# Altium PCB nRF52_UWB_MPU_MPU_V2.0.pcbdoc
Units mil, origin at the board's own origin, x right, y up, seen from the top; angles counter-clockwise.
Board outline 3067.68 x 2456.36 mil, 2 copper layers (Top Layer, Bottom Layer); 31 components, 31 nets, 182 pads, 77 vias.
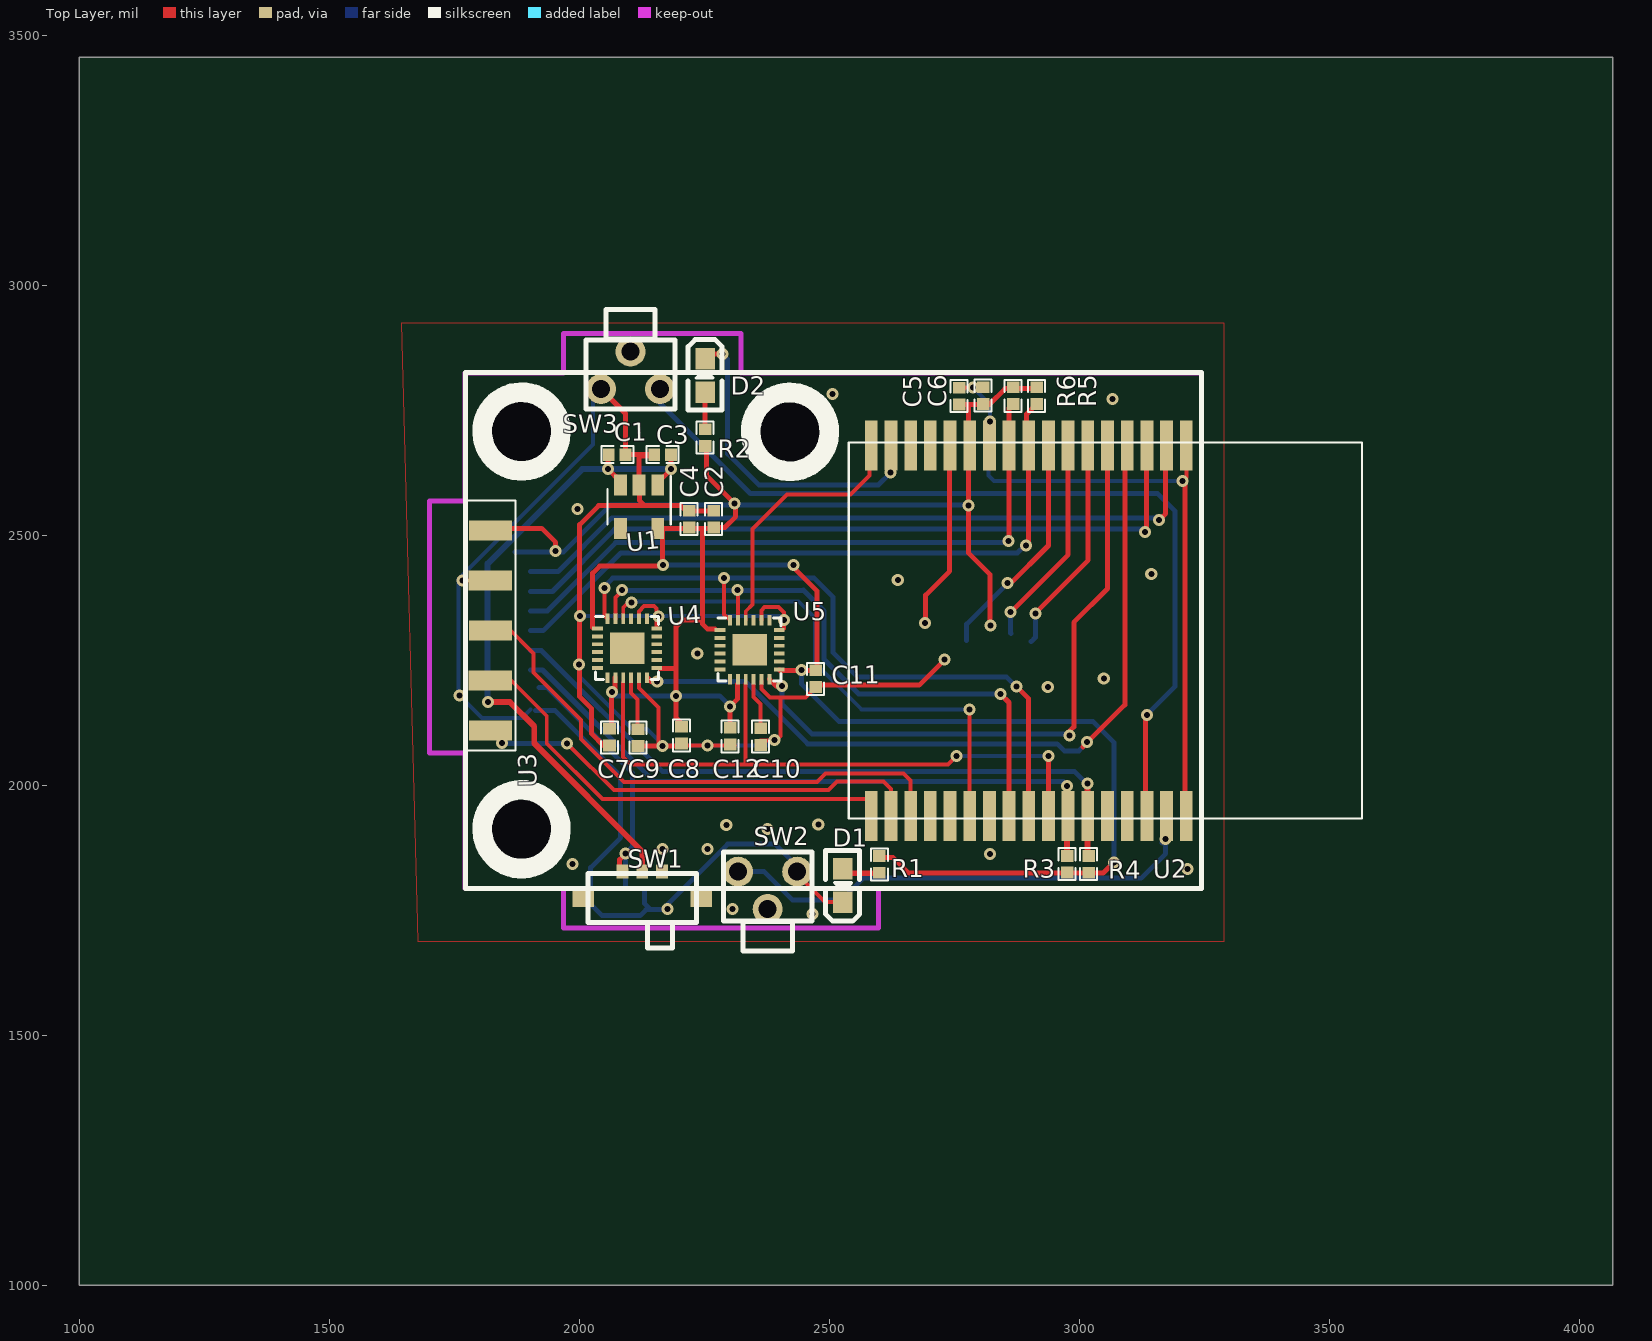
[diagram p0: Top Layer view]
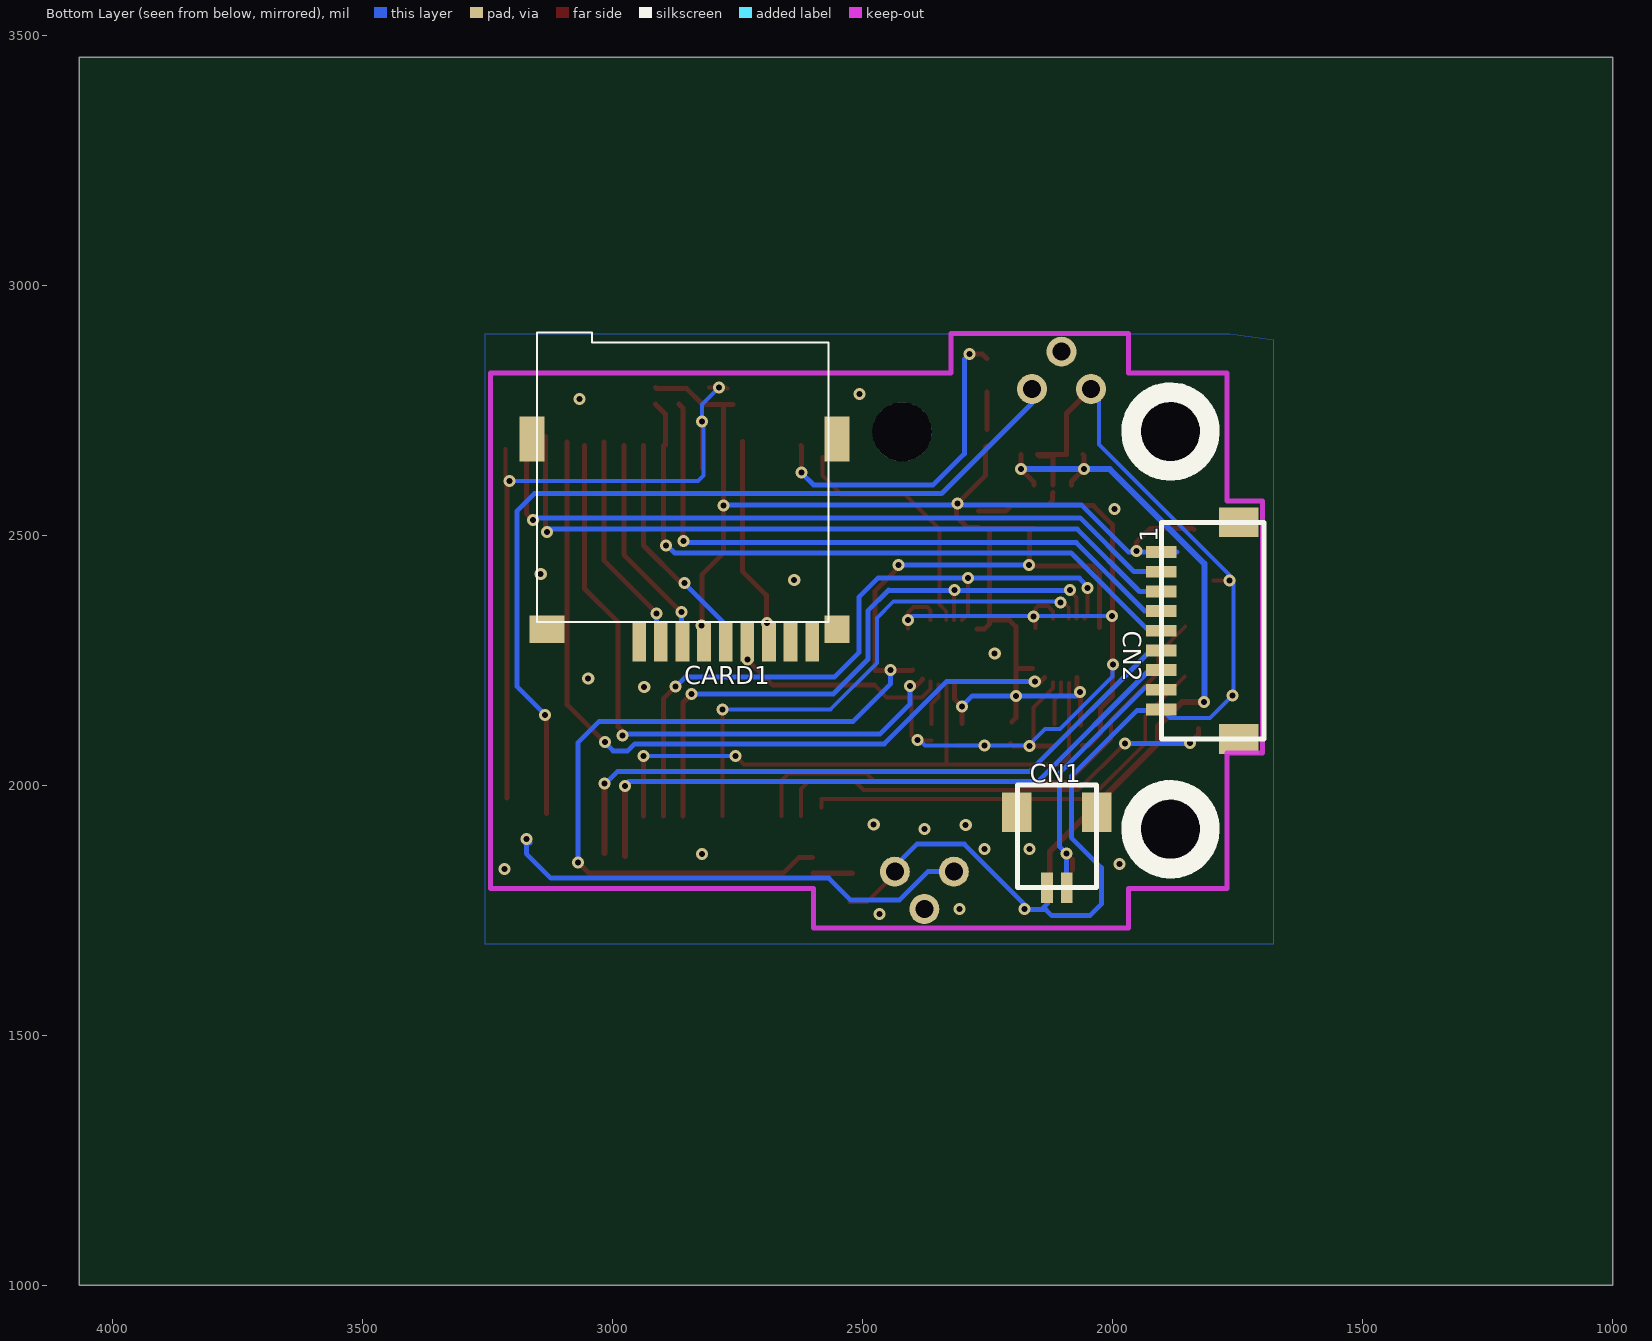
[diagram p1: Bottom Layer view, seen from below]

## Layer stack, top to bottom
Top Layer: signal copper (thickness not stored)
Dielectric: dielectric 12.6, FR-4, Dk 4.8
Bottom Layer: signal copper (thickness not stored)

## Board outline
4067.68,1000 1000,1000 1000,3456.36 4067.68,3456.36

## Components (designator, comment, footprint, x,y, rotation, side; value= is the part's Value field where it differs from the comment)
C1 "10uF" 0402#1 2076.18,2661.11 r180 top
C2 "10uF" 0402#1 2269.18,2532.11 r270 top
C3 "100nF" 0402#1 2167.18,2661.11 r0 top
C4 "100nF" 0402#1 2220.18,2532.11 r270 top
C5 "10uF" 0402#1 2760.18,2778.11 r270 top
C6 "100nF" 0402#1 2808.18,2779.11 r270 top
C7 "10nF" 0402#1 2061.18,2096.11 r90 top
C8 "100nF" 0402#1 2205.18,2100.11 r90 top
C9 "100nF" 0402#1 2118.18,2095.11 r270 top
C10 "100nF" 0402#1 2363.18,2097.11 r270 top
C11 "100nF" 0402#1 2473.18,2213.11 r90 top
C12 "10nF" 0402#1 2302.18,2098.11 r90 top
CARD1 "HYC77-TF09-200" TF-015 2857.18,2489.75 r180 bottom
CN1 "A1002WV-S-2P" A1002WR-S-2P_LEO 2112.11,1871.23 r180 bottom
CN2 "A1002WR-S-9P" A1002WR-S-9P_LEO 1827.27,2309.04 r270 bottom
D1 "RED" LED-0603 2527.18,1799.71 r90 top
D2 "GREEN" LED-0603 2252.18,2819.71 r270 top
R1 "1K" 0402#1 2600.37,1841.7 r270 top
R2 "200" 0402#1 2252.18,2695.11 r270 top
R3 "10K" 0402#1 2976.18,1842.11 r270 top
R4 "10K" 0402#2 3019.14,1841.87 r270 top
R5 "10K" 0402#1 2915.18,2779.11 r90 top
R6 "10K" 0402#1 2868.18,2779.11 r90 top
SW1 "SSAJ120100" SW-SMD-5.5X2.5 2126.51,1801.13 r0 top
SW2 "KAN4562-0501C" KAN4562-0501C 2377.17,1789.7 r0 top
SW3 "KAN4562-0501C" KAN4562-0501C 2102.87,2829.7 r180 top
U1 "SPX3819M5-L-3-3/TR" SOT-23-5 2120.18,2557.11 r270 top
U2 "DWM1001" DWM1001 3051.78,2309.01 r270 top
U3 "GPS_Header" GPS_HEADER_SMT_NEW 1772.71,1793.84 r90 top
U4 "MPU-9250" QFN-24-1EP_3X3MM_PITCH0.4MM 2096.18,2274.11 r0 top
U5 "MPU-9250" QFN-24-1EP_3X3MM_PITCH0.4MM 2341.18,2271.11 r0 top

## Footprints (in the part's own frame and the unit in brackets; to place one, negate y for a bottom-side part, rotate by r counter-clockwise, add the part's x,y. Pads: shape width x height; smd on the part's side, far side on the other; paste and mask are expansions set on the pad)
0402#1 [mil]
  rect 23.6x25.6 smd: 1(-16.69,0.01) 2(16.7,0)
  silkscreen extent -32,-17 32,17
0402#2 [mil]
  rect 23.7x25.6 smd: 1(-16.68,0.03) 2(16.72,0.03)
  silkscreen extent -32,-17 32,17
A1002WR-S-2P_LEO [mil]
  rect 23.6x61 smd: 1(-19.77,-75.78) 2(19.63,-75.78)
  rect 59.1x78.8 smd: 3(-80.02,74.97) 4(79.98,74.97)
  silkscreen extent -79,-76 79,129
A1002WR-S-9P_LEO [mil]
  rect 23.6x61 smd: 1(-157.46,-75.7) 2(-118.06,-75.7) 3(-78.56,-75.8) 4(-39.36,-75.7) 5(0.04,-75.7) 6(39.44,-75.7) 7(78.74,-75.7) 8(118.14,-75.7) 9(157.54,-75.7)
  rect 59.1x78.7 smd: 10(-216.51,78.75)
  rect 59x78.7 smd: 11(216.54,78.75)
  silkscreen extent -217,-76 217,129
DWM1001 [mm]
  rect 2.54x0.65 smd: 1(-9.405,4.13) 2(-9.405,3.129) 3(-9.405,2.128) 4(-9.405,1.129) 5(-9.405,0.129) 6(-9.405,-0.871) 7(-9.405,-1.872) 8(-9.405,-2.87) 9(-9.405,-3.871) 10(-9.405,-4.872) 11(-9.405,-5.87) 12(-9.405,-6.871) 13(-9.405,-7.872) 14(-9.405,-8.871) 15(-9.405,-9.871) 16(-9.405,-10.871) 17(-9.405,-11.872) 18(9.406,-11.872) 19(9.406,-10.871) 20(9.406,-9.871) 21(9.406,-8.871) 22(9.406,-7.872) 23(9.406,-6.871) 24(9.406,-5.87) 25(9.406,-4.872) 26(9.406,-3.871) 27(9.406,-2.87) 28(9.406,-1.872) 29(9.406,-0.871) 30(9.406,0.129) 31(9.406,1.129) 32(9.406,2.128) 33(9.406,3.129) 34(9.406,4.13)
  silkscreen extent -9.56,-13.02 9.54,13.05
GPS_HEADER_SMT_NEW [mm]
  rect 1.021x2.2 smd: 1(18.18,-1.27) 3(13.1,-1.27) 5(8.02,-1.27)
  rect 1.021x2.202 smd: 2(15.64,-1.27) 4(10.56,-1.27)
  round 3 hole 3 slot 3.002 at 90 deg unplated: ""(3,-2.85) ""(23.2,-2.85)
  silkscreen extent 0,-37.4 26.2,0
KAN4562-0501C [mil]
  round 60 hole 36: 0(0,-37.4) 1(-59.05,37.4) 2(59.06,37.4)
  silkscreen extent -89,-122 89,77
LED-0603 [mil]
  rect 43x39 smd: 1(33.5,0) 2(-33.5,0)
  silkscreen extent -72,-34 70,34
QFN-24-1EP_3X3MM_PITCH0.4MM [mil]
  rect 21.65x7.87 smd: 1(-59.06,39.34) 2(-59.06,23.64) 3(-59.06,7.84) 4(-59.06,-7.86) 5(-59.06,-23.66) 6(-59.06,-39.36) 13(59.04,-39.36) 14(59.04,-23.66) 15(59.04,-7.86) 16(59.04,7.84) 17(59.04,23.64) 18(59.04,39.34)
  rect 7.87x21.65 smd: 7(-39.36,-59.06) 8(-23.66,-59.06) 9(-7.86,-59.06) 10(7.84,-59.06) 11(23.64,-59.06) 12(39.34,-59.06) 19(39.34,59.04) 20(23.64,59.04) 21(7.84,59.04) 22(-7.86,59.04) 23(-23.66,59.04) 24(-39.36,59.04)
  rect 34.45x31.5 smd: 25(-17.11,-15.76) 25(-17.11,15.74) 25(17.14,-15.76) 25(17.14,15.74)
  silkscreen extent -63,-63 63,63
SOT-23-5 [mm]
  rect 1.06x0.65 smd: 1(-1.1,0.95) 2(-1.1,0) 3(-1.1,-0.95) 4(1.1,-0.95) 5(1.1,0.95)
  silkscreen extent -1.55,-1.61 0.9,1.61
SW-SMD-5.5X2.5 [mm]
  rect 0.599x0.701 smd: 1(-0.999,0.675) 2(1,0.675) C(-0.001,0.675)
  rect 1.1x0.9 smd: 4(-2.999,-0.675) 5(3,-0.675)
  silkscreen extent -2.75,-3.22 2.75,0.58
TF-015 [mil]
  rect 27.6x78.8 smd: 1(-90.2,-202.55) 4(39.5,-202.55) 5(82.8,-202.55) 6(126,-202.55) 7(169.2,-202.55) 8(212.4,-202.55) 9(255.9,-202.55)
  rect 27.5x78.7 smd: 2(-46.94,-202.5)
  rect 27.5x78.8 smd: 3(-3.75,-202.55)
  rect 50x55 smd: 10(305,-177.4)
  rect 50x90 smd: 11(305.01,202.55) 12(-304.99,202.55)
  rect 70x55 smd: 13(-274.99,-177.45)
  silkscreen extent -295,-163 288,416

## Free pads (board coordinates)
  round 118.11 hole 118.1 slot 118.3 at 0 deg unplated: ""(2421.79,2706.64)

## Via types
v1: diameter 24.02, hole 12, Top Layer to Bottom Layer, 70 vias
v2: diameter 24.41, hole 12, Top Layer to Bottom Layer, 7 vias

## Nets (pads, with @x,y where several pads share a name; then routed paths per layer and width w, separated by ;. In a path a pad name is that pad's centre, name@x,y a point inside that pad or via, vN(x,y) a via of type N, cw(c..) or ccw(c..) an arc to the next point about the centre after c; other vN are vias at no path point)
BUTTON_RST: SW2.1 U2.33 | length 953.7
  Bottom Layer w10: SW2.1@2318.13,1827.15 2370.14,1827.15 2427.18,1770.11 2524.18,1770.11 2568.18,1814.11 3124.18,1814.11 3173.18,1863.11 v1@3173.18,1891.11
  Bottom Layer w11.81: v1@3167.18,1885.11 v1@3173.18,1891.11
  other v1: 3172.83,1892.11
BUTTON_SDCARD: SW3.1 U2.32 | length 1779.5
  Top Layer w10: U2.32@3133.18,1943.11 v1@3133.18,2146.11
  Bottom Layer w10: SW3.1@2161.94,2792.35 2161.94,2764.13 2342.96,2583.11 3157.18,2583.11 3191.37,2548.92 3191.37,2197.3 v1@3136.18,2142.11
  other v1: 3135.83,2140.11
CHARGE_VC: CN1.2 CN2.8 SW1.1 | length 530.6
  Top Layer w10: SW1.1@2081.18,1830.11 2081.18,1851.11 v1@2093.18,1863.11
  Bottom Layer w10: CN2.8@1920.18,2195.11 1936.18,2195.11 2107.18,2024.11 2107.18,1877.81 2092.48,1863.11 CN1.2
  other v1: 2092.83,1863.11
D2_1: D2.1 R2.1 | length 74.4
  Top Layer w10: R2.1 D2.1
FOOT_2: CN2.4 R6.1 U2.10 | length 1293.5
  Top Layer w10: v1@2859.93,2485.11 2859.93,2754.16 R6.1
  Bottom Layer w10: CN2.4 1936.52,2348.45 2073.18,2485.11 v1@2859.18,2485.11
  other v1: 2859.18,2488.11
FOOT_5: CN2.5 R5.1 U2.9 | length 1349.4
  Top Layer w10: U2.9@2895.18,2680.11 2895.18,2742.41 R5.1 ; v1@2899.28,2479.11 U2.9@2899.28,2679.25
  Bottom Layer w10: CN2.5 1928.12,2309.05 2083.77,2464.7 2876.77,2464.7 v1@2891.18,2479.11
  other v1: 2894.18,2479.11
FOOT_6: CN2.6 R4.1 U2.29 | length 1365.8
  Top Layer w11.81: v1@3016.18,2004.11 3017.18,2003.11 R4.1@3017.18,1864.11
  Bottom Layer w10: CN2.6 1924.64,2269.65 2166.59,2027.7 2990.59,2027.7 v1@3017.18,2001.11
  other v1: 3016.83,2003.11
FOOT_7: CN2.7 R3.1 U2.28 | length 1310.7
  Top Layer w11.81: R3.1 v1@2976.18,1998.11
  Bottom Layer w10: CN2.7@1902.98,2230.35 1926.94,2230.35 2149.59,2007.7 2968.59,2007.7 v1@2978.18,1998.11
  other v1: 2975.83,1998.11
GND: C1.1 C2.1 C3.1 C4.1 C5.1 C6.1 C7.1 C8.1 C9.2 C10.2 C11.1 C12.1 CARD1.6 CN1.1 CN2.9 D1.2 SW2.2 SW3.2 U1.2 U2.1 U2.11 U2.24 U2.34 U3.2 U4.11 U4.18 U4.20 U5.11 U5.18 U5.20 | length 6577.8
  Top Layer w7.87: v1@1761.18,2179.11 v1@1762.18,2180.11 ; v1(1767.37,2409.7) U3.2@1799.37,2409.7 ; U4.20 2119.83,2347.76 2130.18,2358.11 2150.18,2358.11 2155.18,2353.11 U4.18@2155.18,2314.11 ; U4.11@2120.18,2205.11 2120.18,2194.11 2159.18,2155.11 v1@2159.18,2078.41 ; C8.1@2209.18,2079.11 C12.1@2312.18,2079.11 ; C10.2@2363.18,2089.41 2394.48,2089.41 2403.18,2098.11 2403.18,2175.7 ; U5.20 2364.83,2349.76 2371.18,2356.11 2399.18,2356.11 2410.18,2345.11 U5.18@2410.18,2313.11 ; U5.11@2365.08,2207.39 2365.08,2192.21 2381.59,2175.7 2452.77,2175.7 C11.1@2477.18,2200.11 ; SW2.2@2441.18,1817.11 2492.04,1766.25 D1.2 ; C5.1@2771.18,2793.11 2773.88,2795.81 C6.1 ; U2.11@2820.18,2729.11 2822.18,2727.11 U2.11@2822.18,2633.11 ; v1@3207.18,2607.11 3215.18,2615.11 U2.1@3215.18,2672.11
  Top Layer w10: SW3.2@2043.83,2792.35 2092.88,2743.3 C1.1 C3.1 2147.48,2658.11 2119.18,2658.11 2120.18,2657.11 U1.2 ; C7.1 2048.88,2079.41 2025.18,2103.11 2025.18,2153.11 2001.18,2177.11 2001.18,2521.11 2039.18,2559.11 2203.18,2559.11 2213.48,2548.81 C2.1 ; C9.2 2200.18,2078.41 C8.1 ; U1.2@2120.18,2585.11 2121.18,2584.11 2121.18,2569.11 2131.18,2559.11 ; C11.1@2477.18,2200.11 2680.18,2200.11 v1@2731.18,2251.11 ; v1(3206.83,2608.11) 3212.18,2602.76 U2.34@3212.18,1974.11
  Bottom Layer w7.87: CN2.9@1902.98,2151.55 1885.54,2134.11 1806.18,2134.11 1759.18,2181.11 1759.18,2412.11 2028.18,2681.11 2028.18,2776.7 SW3.2@2043.83,2792.35 ; v1@2000.18,2241.11 2000.95,2240.34 2000.95,2217.11 2105.95,2112.11 2136.18,2112.11 2169.18,2079.11 2376.18,2079.11 v1@2388.18,2091.11 ; v1@2002.18,2338.11 2401.83,2338.11 v1(2409.83,2330.11) ; v1(2787.83,2795.81) 2821.83,2761.81 v1(2821.83,2727.11) 2819.18,2724.46 2819.18,2619.11 2830.18,2608.11 v1(3206.83,2608.11)
  Bottom Layer w10: CN2.9@1913.18,2149.11 1952.18,2149.11 2083.18,2018.11 2083.18,1895.11 2023.18,1835.11 2023.18,1762.11 2046.18,1739.11 2122.18,1739.11 2134.18,1751.11 2166.18,1751.11 2297.18,1882.11 2392.18,1882.11 SW2.2@2437.18,1837.11 ; CN1.1@2131.18,1792.11 2131.18,1763.11 2143.18,1751.11 ; SW2.2@2428.18,1808.11 SW2.2@2435.18,1815.11
  other v1: 2467.18,1742.11 2177.18,1752.11 2307.18,1752.11 3217.18,1832.11 1987.18,1842.11 2821.37,1862.7 2167.18,1872.11 2257.18,1872.11 2377.18,1912.11 2167.18,2078.41 2257.18,2079.11 2391.27,2090.2 1760.83,2179.11 1999.83,2241.11 2730.83,2251.11 2001.83,2338.11 2158.91,2337.93 1997.18,2552.11 3067.18,2772.11 2507.18,2782.11
  other v2: 2294.37,1920.7 2478.37,1921.7 2937.37,2196.7 3049.36,2213.68 2236.37,2263.7 2637.37,2410.7 3144.37,2422.7
GPS_1PPS: U2.19 U3.5 | length 916.1
  Top Layer w7.87: v1@1981.18,2078.89 2069.96,1990.11 2499.18,1990.11 2516.18,2007.11 2609.18,2007.11 2623.68,1992.61 U2.19@2623.68,1938.75
  Top Layer w10: U3.5@1829.37,2113.7 1829.37,2101.7 v1(1846.37,2084.7)
  Bottom Layer w10: v1@1843.37,2085.7 1845.37,2083.7 v1(1976.37,2083.7)
GPS_UART_RX: U2.18 U3.4 | length 877.8
  Top Layer w7.87: U3.4@1856.37,2217.7 1935.37,2138.7 1935.37,2083.7 2046.96,1972.11 2583.18,1972.11 U2.18@2583.18,1955.11
GPS_UART_TX: U2.20 U3.3 | length 1065
  Top Layer w7.87: U3.3@1855.37,2317.7 1909.18,2263.89 1909.18,2225.11 2004.18,2130.11 2004.18,2092.11 2090.18,2006.11 2476.18,2006.11 2493.18,2023.11 2649.18,2023.11 2663.08,2009.21 U2.20@2663.08,1938.75
INT_IMUA: U2.4 U4.12 | length 1593
  Top Layer w10: U4.12@2136.81,2215.06 2144.17,2207.7 v1(2156.37,2207.7) ; 3007.37,2076.7 3091.37,2160.7 U2.4@3091.37,2686.7
  Bottom Layer w10: v1(2156.37,2207.7) 2332.37,2207.7 2457.17,2082.9 2956.17,2082.9 2970.37,2068.7 2999.37,2068.7 v1@3017.09,2086.42
  other v1: 3015.37,2086.7
INT_IMUB: U2.5 U5.12 | length 1262.1
  Top Layer w10: U5.12@2380.53,2212.06 2393.89,2198.7 v1@2396.37,2198.7 ; v1@2976.37,2103.7 2989.37,2116.7 2989.37,2325.7 3056.85,2393.18 U2.5@3056.85,2679.26
  Bottom Layer w10: v1(2405.37,2198.7) 2405.37,2162.7 2465.37,2102.7 v1@2976.37,2102.7
  other v1: 2980.37,2099.7
LED_R: D2.2 U2.16 | length 658.3
  Top Layer w10: D2.2 2261.04,2862.11 v1(2287.18,2862.11) ; v1(2623.18,2625.11) 2623.18,2678.75 U2.16@2623.68,2679.25
  Bottom Layer w10: v1(2287.18,2862.11) 2297.18,2852.11 2297.18,2662.89 2359.37,2600.7 2598.77,2600.7 v1(2623.18,2625.11)
MPU92_CLK: U2.25 U4.23 U5.23 | length 1269.6
  Top Layer w7.87: U4.23 2072.53,2375.46 v1@2086.18,2389.11 ; U5.23 v1@2317.53,2390.11
  Top Layer w10: v1(2843.18,2182.11) 2859.93,2165.36 U2.25@2859.93,1938.75
  Bottom Layer w10: v1@2086.18,2389.11 2446.93,2389.11 ; 2448.93,2390.11 2490.18,2348.86 2490.18,2251.65 2558.95,2182.88 ; 2558.95,2182.11 v1(2843.18,2182.11)
  other v1: 2086.18,2390.11 2317.18,2390.11
MPU92_MISO: U2.27 U4.9 U5.9 | length 1293.1
  Top Layer w7.87: 2088.18,2204.11 2088.18,2056.11 2103.18,2041.11 2738.18,2041.11 v1(2755.18,2058.11) ; 2333.18,2041.11 U5.9@2333.18,2203.11
  Top Layer w10: U2.27@2938.68,1938.75 v1(2938.68,2058.11)
  Bottom Layer w7.87: v1(2755.18,2058.11) v1(2938.68,2058.11)
MPU92_MOSI: U2.26 U4.24 U5.24 | length 1416.8
  Top Layer w7.87: v1(2051.18,2394.11) 2051.18,2338.81 U4.24 ; v1@2290.18,2422.11 2290.18,2341.76 U5.24
  Top Layer w10: v1(2875.18,2197.11) 2899.28,2173.01 U2.26@2899.28,1938.75
  Bottom Layer w10: v1@2049.18,2396.11 2067.18,2414.11 2470.18,2414.11 2508.18,2376.11 2508.18,2265.11 2557.18,2216.11 2855.18,2216.11 2874.18,2197.11 v1(2875.18,2197.11)
  other v1: 2290.18,2414.11
MPU92_NCS: U2.23 U4.22 | length 1076.8
  Top Layer w7.87: U4.22 2088.33,2355.8 2099.64,2367.11 v1@2107.18,2367.11 ; U2.23@2781.18,1938.75 v1(2781.18,2151.11)
  Bottom Layer w7.87: v1@2105.18,2367.11 2439.4,2367.11 2472.18,2334.33 2472.18,2244.2 2565.27,2151.11 v1(2781.18,2151.11)
  other v1: 2105.18,2365.11
MPU92B_NCS: U2.17 U5.22 | length 503
  Top Layer w7.87: U5.22 2333.33,2348.04 2347.18,2361.89 2347.18,2512.11 2416.18,2581.11 2543.18,2581.11 2581.18,2619.11 U2.17@2581.18,2656.11
R1_2: D1.1 R1.2 | length 77
  Top Layer w11.81: D1.1@2522.18,1824.11 R1.2@2599.18,1824.11
SDCARD_CLK: CARD1.5 U2.8 | length 459.6
  Top Layer w10: v1@2860.18,2401.11 2938.68,2479.61 U2.8@2938.68,2679.25
  Bottom Layer w10: CARD1.5@2775.18,2289.11 2775.18,2322.11 v1@2857.18,2404.11
  other v1: 2856.83,2404.11
SDCARD_MISO: CARD1.7 U2.13 | length 383.1
  Top Layer w10: v1@2690.18,2325.11 2693.18,2328.11 2693.18,2380.11 2741.18,2428.11 U2.13@2741.18,2687.11
  other v1: 2691.83,2324.11
SDCARD_MOSI: CARD1.3 U2.7 | length 424.3
  Top Layer w10: v1@2863.18,2346.11 2978.08,2461.01 U2.7@2978.08,2679.25
  Bottom Layer w10: v1(2862.83,2346.11) 2862.83,2304.46 CARD1.3@2864.18,2303.11
SDCARD_NCS: CARD1.2 U2.6 | length 446.8
  Top Layer w10: v1@2911.18,2343.11 3018.18,2450.11 U2.6@3018.18,2686.11
  Bottom Layer w10: CARD1.2 2912.83,2295.95 v1(2912.83,2343.11)
SWD_CLK: CN2.2 U2.2 | length 1473.7
  Top Layer w10: v1(3160.18,2530.11) 3173.18,2543.11 U2.2@3173.18,2694.11
  Bottom Layer w10: CN2.2@1902.98,2427.15 1957.94,2427.15 2065.49,2534.7 v1@3153.47,2534.7 ; v1@3153.59,2536.7 v1(3160.18,2530.11)
SWD_DIO: CN2.3 U2.3 | length 1471.7
  Top Layer w10: v1@3135.18,2506.11 U2.3@3135.18,2697.11
  Bottom Layer w10: CN2.3 1946.72,2387.65 2071.18,2512.11 v1@3132.18,2512.11
  other v1: 3132.18,2506.11
U4_10: C9.1 U4.10 | length 88.7
  Top Layer w7.87: U4.10@2104.08,2205.39 2104.08,2184.21 2117.18,2171.11 C9.1@2117.18,2122.11
U5_10: C10.1 U5.10 | length 84.4
  Top Layer w7.87: U5.10@2349.08,2201.39 2349.08,2176.91 2363.18,2162.81 C10.1@2363.18,2122.81
VCC3.3: C2.2 C4.2 C5.2 C6.2 C7.2 C8.2 C11.2 C12.2 CARD1.4 CN2.1 R1.1 R2.2 R3.2 R4.2 R5.2 R6.2 U1.5 U2.12 U3.1 U4.1 U4.8 U4.13 U5.1 U5.8 U5.13 | length 5336.4
  Top Layer w7.87: v1@2065.18,2178.11 v1@2072.18,2185.11
  Top Layer w10: U3.1@1838.37,2511.7 1840.37,2513.7 1925.37,2513.7 1953.37,2485.7 v1(1953.37,2468.7) ; U4.1@2027.18,2315.11 2027.18,2424.11 2041.18,2438.11 2167.18,2438.11 U1.5@2167.18,2513.81 ; C7.2@2065.18,2120.11 v1@2065.18,2178.11 ; v1@2072.18,2185.11 U4.8@2072.18,2215.06 ; U1.5 2267.58,2513.81 C2.2 2291.48,2515.41 2313.18,2537.11 2313.18,2561.11 2254.48,2619.81 2254.48,2676.11 R2.2 ; U4.13@2161.18,2233.11 2192.48,2233.11 2194.18,2234.81 ; C8.2@2202.18,2126.81 2194.18,2134.81 2194.18,2317.11 2207.18,2330.11 2247.18,2330.11 ; 2247.18,2512.81 2247.18,2322.11 2257.18,2312.11 U5.1@2272.18,2312.11 ; C12.2@2302.18,2123.81 v1(2302.18,2157.81) 2317.08,2172.71 U5.8@2317.08,2202.39 ; U5.13@2401.34,2230.65 2402.18,2229.81 2476.18,2229.81 2476.18,2388.11 v1@2428.18,2436.11 ; R1.1@2600.37,1855.11 2628.18,1855.11 2659.18,1824.11 3047.78,1824.11 v1(3069.37,1845.7) ; v1@2823.18,2319.11 2822.18,2320.11 2822.18,2421.11 2779.18,2464.11 2779.18,2759.11 2781.18,2761.11 2760.48,2761.11 C5.2 2820.48,2761.41 2852.18,2793.11 2912.48,2793.11 R5.2
  Bottom Layer w10: 1872.18,2466.11 1968.61,2466.11 2063.2,2560.7 2773.59,2560.7 v1@2780.18,2554.11 ; v1(2065.83,2186.11) 2073.24,2178.7 2281.29,2178.7 v1(2302.18,2157.81) ; v1@2170.72,2440.11 v1(2429.18,2440.11) ; v1(2444.37,2230.7) 2444.37,2202.7 2519.37,2127.7 3027.37,2127.7 3069.37,2085.7 v1(3069.37,1845.7)
  other v1: 2194.18,2178.7 2822.83,2319.11 2168.18,2440.11 2779.18,2559.11 2311.18,2563.11
VCC3.7: C1.2 C3.2 SW1.C U1.1 U1.3 | length 1483.3
  Top Layer w10: C1.2 2058.18,2659.81 v1(2058.18,2632.11) 2082.78,2607.51 U1.3 ; U1.1 2157.58,2605.51 v1(2184.18,2632.11) 2184.18,2660.81 C3.2
  Top Layer w11.81: v1(1818.18,2166.11) 1861.96,2166.11 1910.37,2117.7 1910.37,2083.7 2126.47,1867.6 SW1.C
  Bottom Layer w10: v1(2058.18,2632.11) v1(2184.18,2632.11)
  Bottom Layer w11.81: v1@1817.18,2166.11 1817.18,2443.11 2006.18,2632.11 v1(2184.18,2632.11)
pads on no net: CARD1.1 CARD1.8 CARD1.9 CARD1.10 CARD1.11 CARD1.12 CARD1.13 CN1.3 CN1.4 CN2.10 CN2.11 SW1.2 SW1.4 SW1.5 SW2.0 SW3.0 U1.4 U2.14 U2.15 U2.21 U2.22 U2.30 U2.31 U3. U4.2 U4.3 U4.4 U4.5 U4.6 U4.7 U4.14 U4.15 U4.16 U4.17 U4.19 U4.21 U4.25 U5.2 U5.3 U5.4 U5.5 U5.6 U5.7 U5.14 U5.15 U5.16 U5.17 U5.19 U5.21 U5.25

## Polygon pours and split planes (outlines as drawn)
GND on Bottom Layer (solid): 1766.37,2901.7 3256.37,2901.7 3256.37,1682.7 1678.37,1682.7 1678.37,2889.7
GND on Top Layer (solid): 1645.37,2924.7 3289.37,2924.7 3289.37,1686.7 1678.37,1686.7

## Silkscreen, mask and mechanical layers (free items; w line width, h text height)
Top Overlay:
  lines w39.37: 2500.45,2703.15 cw(c2421.79,2706.7) 2500.53,2706.64
Document:
  lines w0.1: 2532.84,2227.18 2534.84,2229.18

## Text inside footprints (layer, text, board x,y; h text height)
CN2: Bottom Overlay "1" at 1910.47,2486.21 h35.43 r270
U3: Mechanical 3 "37.4" at 2652.04,1580 h80 r180; Mechanical 3 "26.2" at 1580,2574.32 h80 r90